# Altium PCB atuador_heater.PcbDoc
Units mm, origin at the board's own origin, x right, y up, seen from the top; angles counter-clockwise.
Board outline 50 x 50 mm, 2 copper layers (Top Layer, Bottom Layer); 10 components, 9 nets, 32 pads, 0 vias.
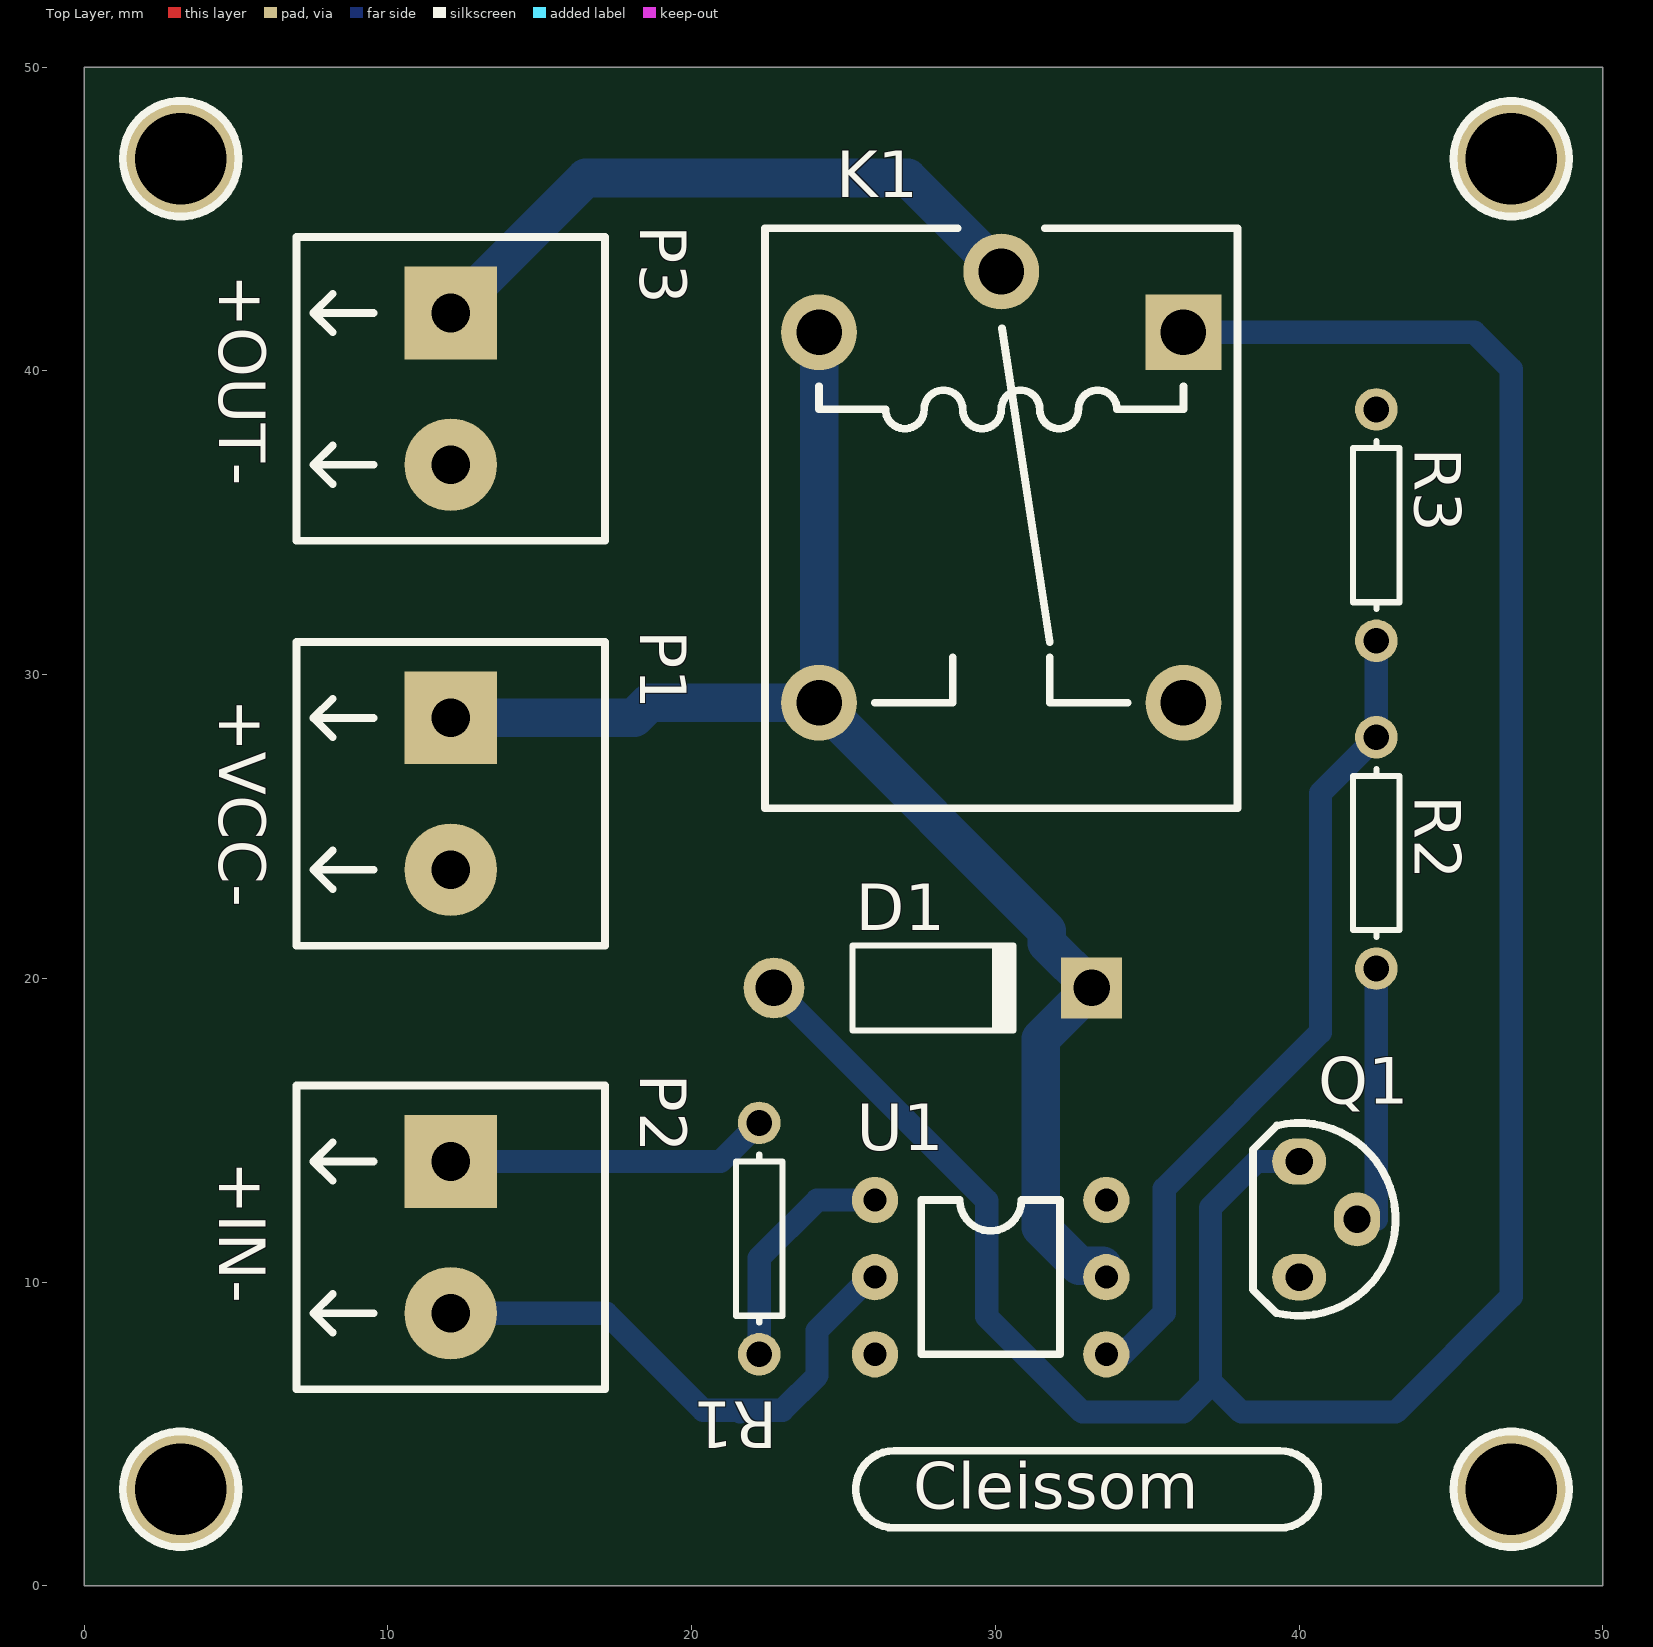
[diagram p0: Top Layer view]
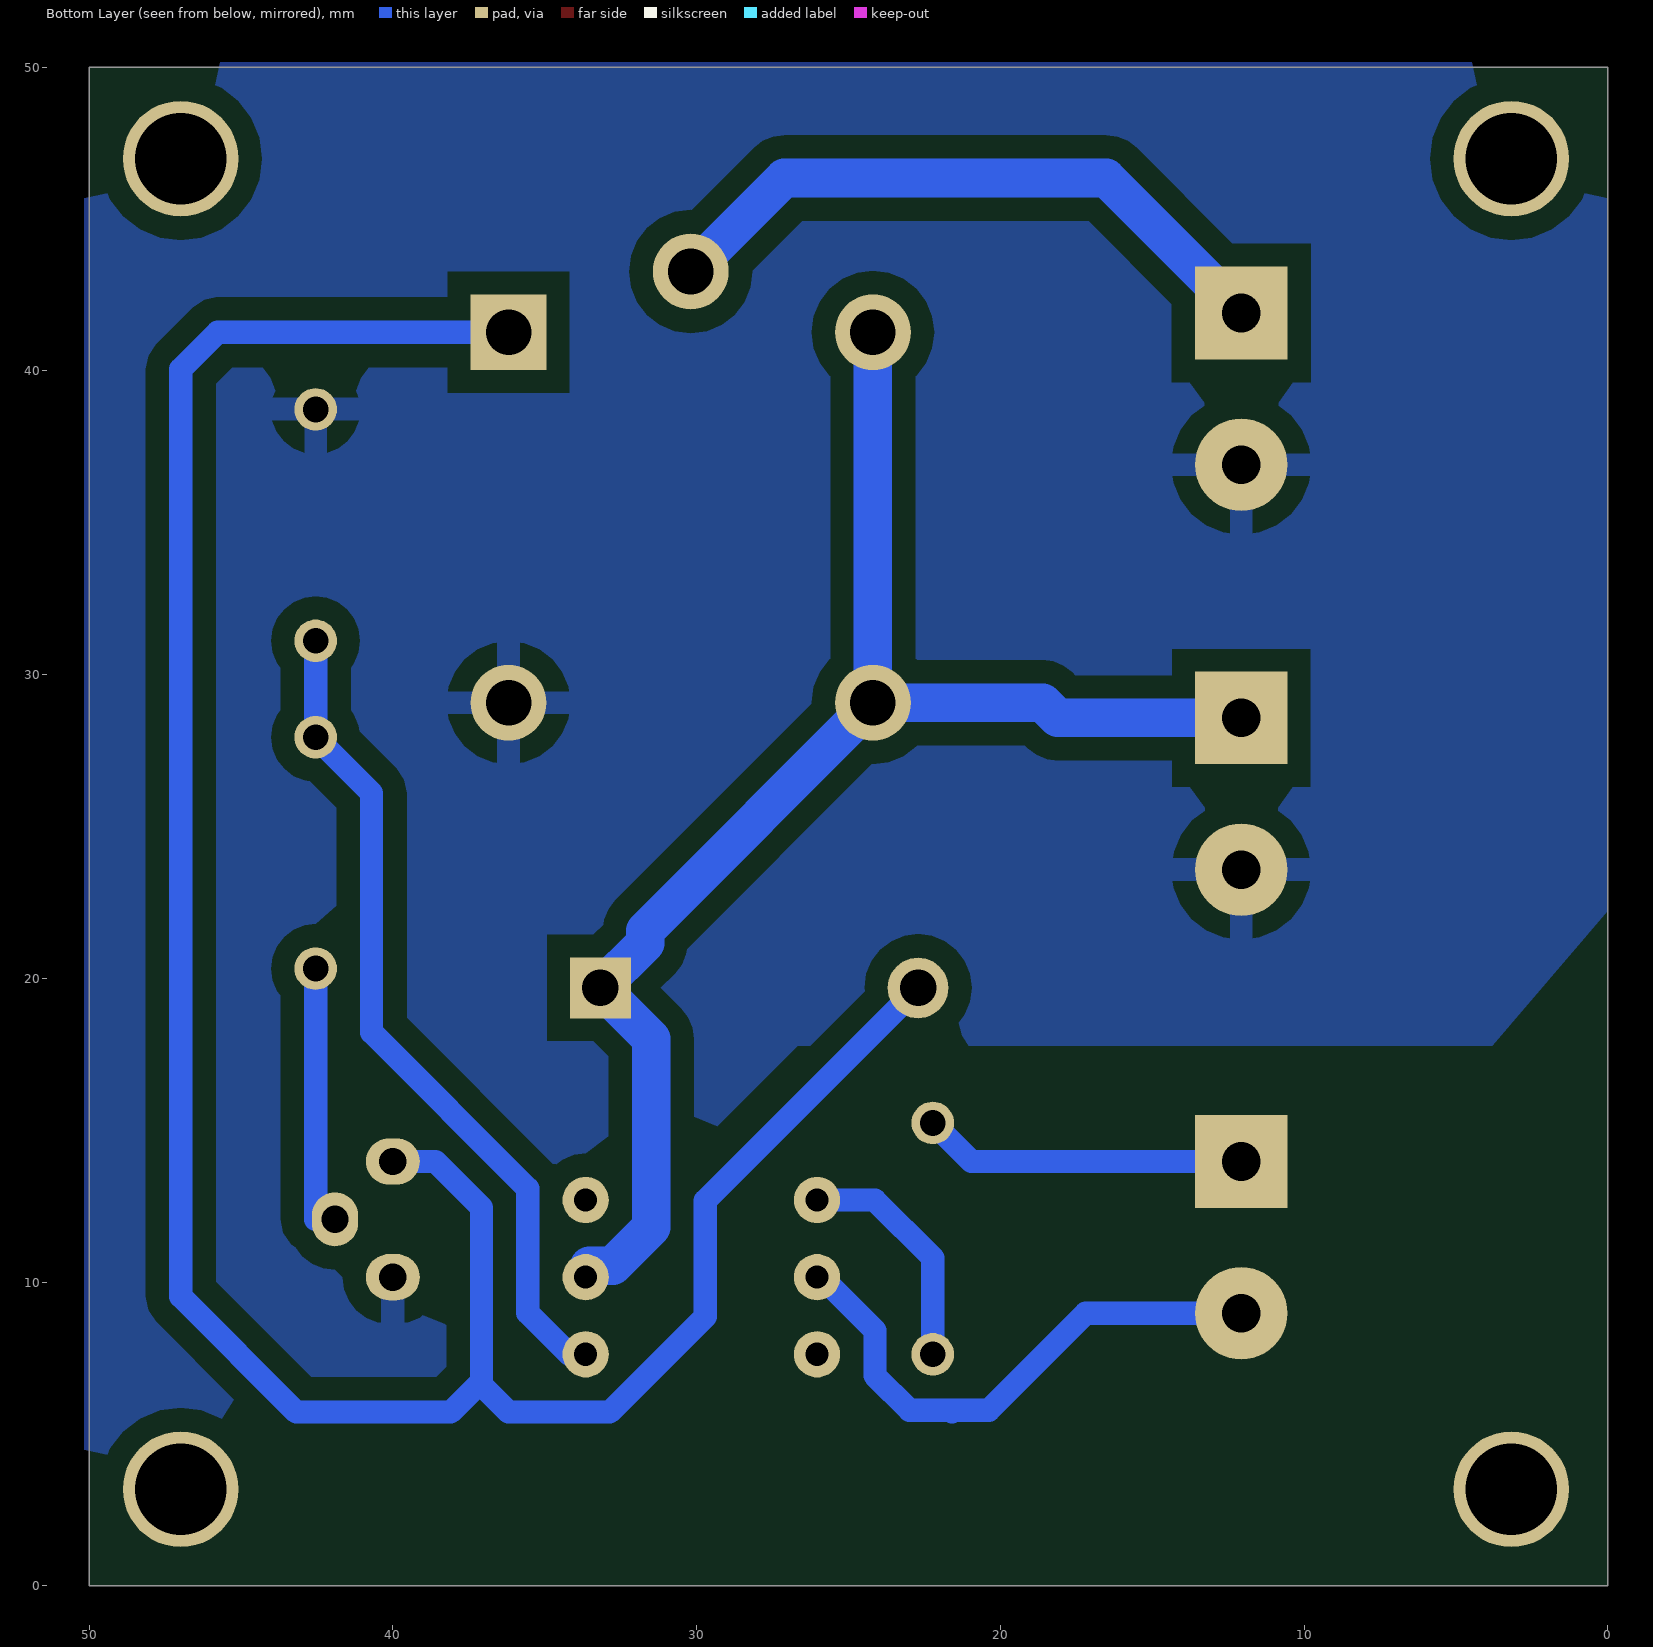
[diagram p1: Bottom Layer view, seen from below]
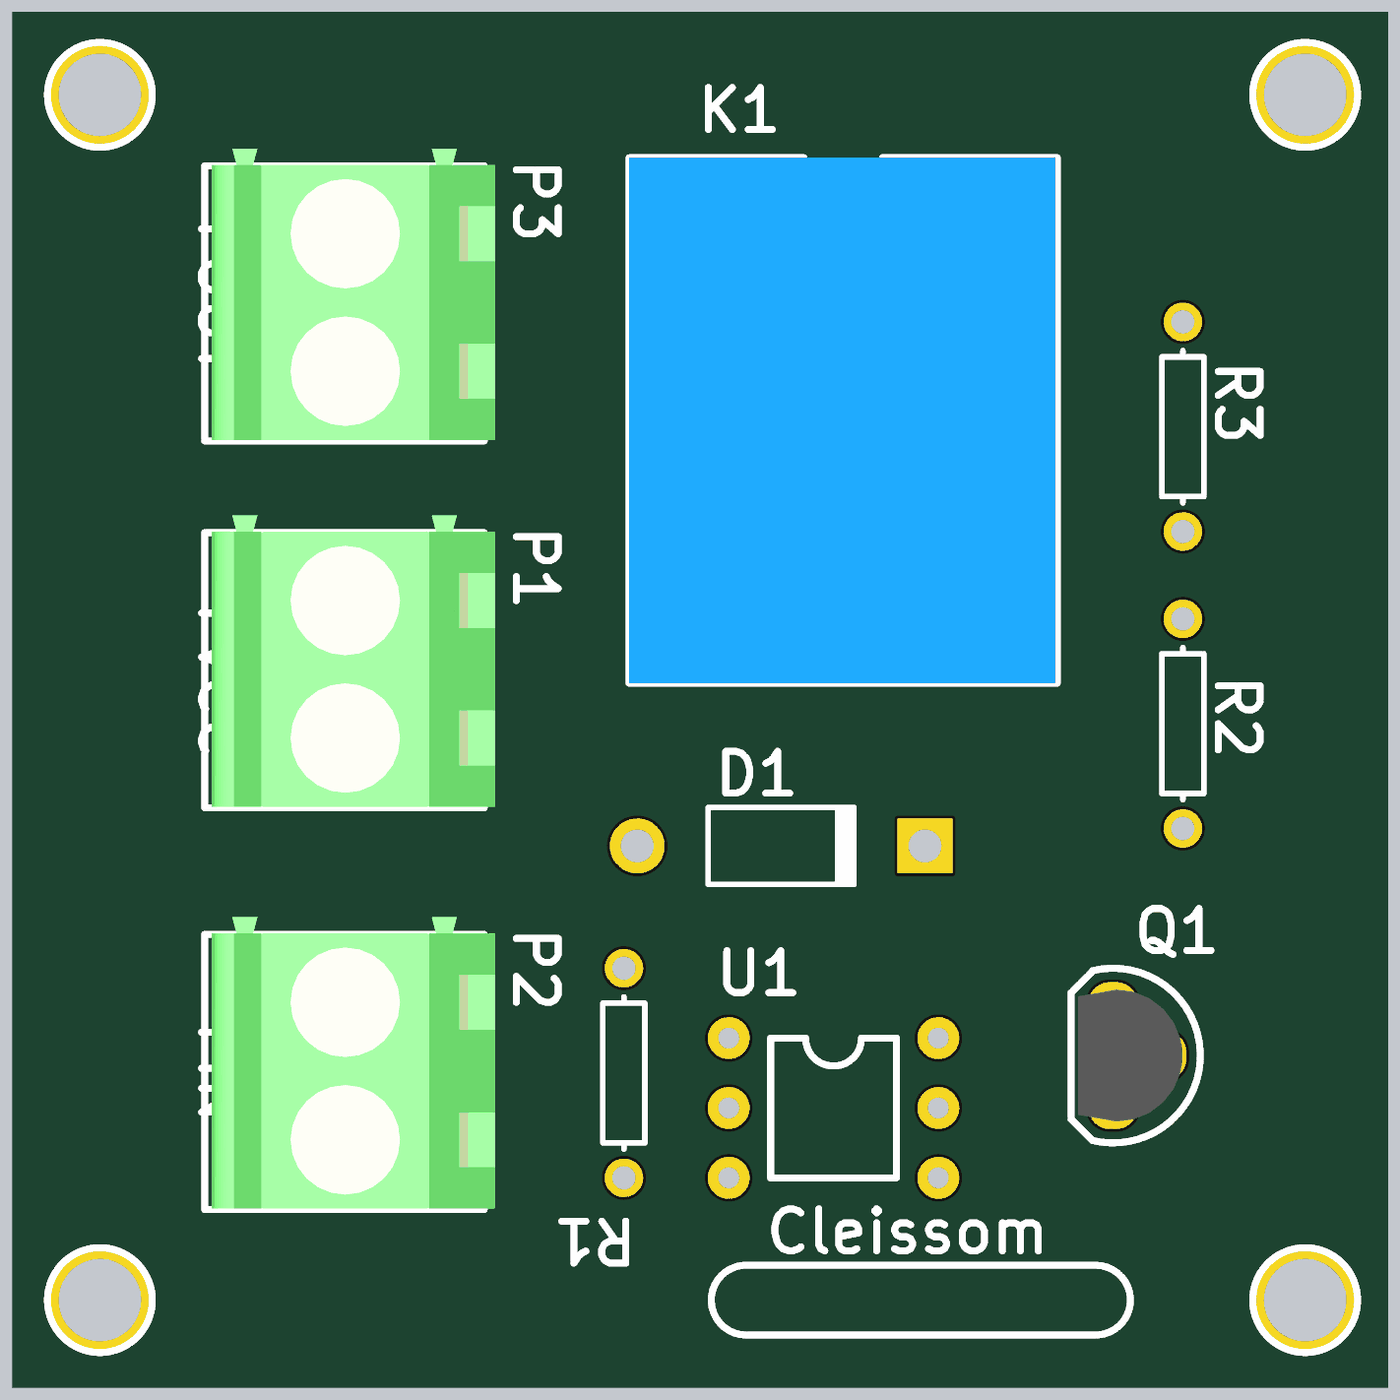
[diagram p2: 3D render of the assembled board from above, using the file's embedded part models]

## Layer stack, top to bottom
Top Solder: solder mask 0.0102, Solder Resist, Dk 3.5
Top Layer: signal copper 0.0356
Dielectric 1: dielectric 0.32, FR-4, Dk 4.8
Bottom Layer: signal copper 0.0356
Bottom Solder: solder mask 0.0102, Solder Resist, Dk 3.5

## Board outline
0,0 50,0 50,50 0,50

## Design rules (kind name [scope] priority, off if disabled: settings)
Clearance [All] p1: gap=0.762
PlaneConnect [All] p1: planeconnectstyle=Relief reliefexpansion=0.762 reliefentries=4 reliefconductorwidth=0.762 reliefairgap=0.762
PolygonConnect [All] p1: connectstyle=Relief reliefconductorwidth=0.762 reliefentries=4 polygonreliefangle="90 Angle" airgapwidth=0.762
RoutingLayers [All] p1: top layer_v5=FALSE bottom layer_v5=TRUE
RoutingVias [All] p1: holewidth=0.711 width=1.27 viastyle="Through Hole" minholewidth=0.711 minwidth=1.27 maxholewidth=0.711 maxwidth=1.27
SolderMaskExpansion [All] p1: expansion=0.102
Width Width_VCC [InNet('VCC')] p1: maxlimit=1.524 minlimit=1.27 preferedwidth=1.27
Width Width_NetK1 [InNet('NetK1_3')] p2: maxlimit=2.032 minlimit=1.27 preferedwidth=1.27
Width [All] p3: maxlimit=1.524 minlimit=0.762 preferedwidth=0.762
28 further rules are at their usual default settings.

## Components (designator, comment, footprint, x,y, rotation, side; value= is the part's Value field where it differs from the comment)
D1 "Diode 1N4007" DO-41 27.94,19.685 r0 top
K1 "AX1RC1" Relay-A 36.195,41.275 r0 top
P1 "Terminal" KRE_2 12.065,28.575 r270 top
P2 "Terminal" KRE_2 12.065,13.97 r270 top
P3 "Terminal" KRE_2 12.065,41.91 r270 top
Q1 "BC547" TO-92/CBE 40.005,13.97 r270 top
R1 "Res1" AXIAL-0.3 22.225,11.43 r270 top
R2 "Res1" AXIAL-0.3 42.545,24.13 r270 top
R3 "Res1" AXIAL-0.3 42.545,34.925 r270 top
U1 "4N25" 4N25 28.575,7.62 r0 top

## Footprints (in the part's own frame and the unit in brackets; to place one, negate y for a bottom-side part, rotate by r counter-clockwise, add the part's x,y. Pads: shape width x height; smd on the part's side, far side on the other; paste and mask are expansions set on the pad)
4N25 [mil]
  round 60 hole 30: 1(-100,200) 2(-100,100) 3(-100,0) 4(200,200) 5(200,100) 6(200,0)
  silkscreen extent -40,0 140,200
AXIAL-0.3 [mm] "Axial Device, Thru-Hole; 2 Leads; 0.3 in Pin Spacing"
  round 1.4 hole 0.85: 1(-3.81,0) 2(3.81,0)
  silkscreen extent -2.77,-0.76 2.77,0.76
DO-41 [mm] "Diode, Axial; Body 5.2 x 2.7 mm (LxDia. max), Lead Dia. 0.86 mm (max)"
  round 2 hole 1.2: 1(-5.23,0)
  rect 2x2 hole 1.2: 2(5.23,0)
  silkscreen extent -2.65,-1.4 2.75,1.4
KRE_2 [mil] "Terminal Block 2 pins"
  rect 120x120 hole 50: 1(0,0)
  round 120 hole 50: 2(196.85,0)
  silkscreen extent -98,-200 295,200, body extent -123,-190 294,216, height 559
Relay-A [mm] "Metaltex Relay Type A; 3D: Jean-François Garneau"
  rect 2.5x2.5 hole 1.5: 1(0,0)
  round 2.5 hole 1.5: 2(-12,0) 3(-6,2) 4(0,-12.2) 5(-12,-12.2)
  silkscreen extent -13.78,-15.67 1.78,3.43, body extent -13.78,-15.67 1.72,3.43, height 15.3
TO-92/CBE [mil] "Transistor Outline Package, Case Style 92 CBE; 3D Sergey Atanov"
  oval 70x60 hole 35.43: B(75,75)
  oval 60x70 hole 35.43: C(0,0) E(150,0)
  silkscreen extent -50,-60 200,125, body extent -37,-50 187,100, height 239

## Part data
D1: "1 Amp General Purpose Rectifier"
K1: "Miniature Relay, 15 A, 6 Vdc, 250 Vac"
P1 P2 P3: library part KRE_2, "Terminal Block 1x2"
Q1: "NPN Epitaxial Silicon Transistor"
R1 R2 R3: "Resistor"

## Free pads (board coordinates)
  round 3.81 hole 3: 0(3.175,3.175) 0(3.175,46.99) 0(46.99,3.175) 0(46.99,46.99)

## Nets (pads, with @x,y where several pads share a name; then routed paths per layer and width w, separated by ;. In a path a pad name is that pad's centre, name@x,y a point inside that pad or via, vN(x,y) a via of type N, cw(c..) or ccw(c..) an arc to the next point about the centre after c; other vN are vias at no path point)
GND: K1.4 P1.2 P3.2 Q1.E R3.1
NetD1_1: D1.1 K1.1 Q1.C | length 85.9
  Bottom Layer w0.762: D1.1 29.718,12.677 29.718,8.863 32.866,5.715 36.195,5.715 37.084,6.604 37.084,6.731 ; K1.1 45.771,41.275 46.99,40.056 46.99,9.525 43.18,5.715 38.1,5.715 37.084,6.731 ; Q1.C 38.608,13.97 37.084,12.446 37.084,6.731
NetK1_3: K1.3 P3.1 | length 21.2
  Bottom Layer w1.27: P3.1 16.51,46.355 27.115,46.355 K1.3
NetP2_1: P2.1 R1.1 | length 10.7
  Bottom Layer w0.762: P2.1 20.955,13.97 R1.1
NetP2_2: P2.2 U1.2 | length 18
  Bottom Layer w0.762: P2.2 17.189,8.97 20.382,5.777 21.528,5.777 21.59,5.715 21.652,5.777 22.988,5.777 24.13,6.919 24.13,8.409 25.881,10.16 U1.2
NetQ1_B: Q1.B R2.2 | length 8.9
  Bottom Layer w0.762: Q1.B 42.545,12.065 R2.2
NetR1_2: R1.2 U1.1 | length 7.8
  Bottom Layer w0.762: R1.2 22.225,10.795 24.13,12.7 U1.1
NetR2_1: R2.1 R3.2 U1.6 | length 27.5
  Bottom Layer w0.762: U1.6 34.19,7.62 35.56,8.99 35.56,13.077 40.702,18.219 40.702,26.097 R2.1 R3.2
VCC: D1.2 K1.2 K1.5 P1.1 U1.5 | length 49.3
  Bottom Layer w1.27: P1.1 18.11,28.575 18.61,29.075 K1.5 ; K1.2 K1.5 ; U1.5 33.528,10.16 33.528,10.541 32.761,10.541 31.496,11.806 31.496,18.011 D1.2 31.699,21.156 31.699,21.571 K1.5
pads on no net: U1.3 U1.4

## Polygon pours and split planes (outlines as drawn)
GND on Bottom Layer "GND_L02_P-001" (solid, remove dead copper, pour order 2): 0,50.165 50.165,50.165 50.165,0 49.53,0.635 36.195,0.635 35.56,0.635 29.845,6.35 29.845,14.605 26.67,17.78 16.51,17.78 3.81,17.78 0,22.225

## Silkscreen, mask and mechanical layers (free items; w line width, h text height)
Top Overlay:
  circle w0.254: c3.175,3.175 r1.905
  circle w0.254: c46.99,3.175 r1.905
  circle w0.254: c46.99,46.99 r1.905
  circle w0.254: c3.175,46.99 r1.905
  lines w0.254: 26.67,1.905 cw(c26.67,3.175) 26.67,4.445 39.37,4.445 cw(c39.37,3.175) 39.37,1.905 26.67,1.905
  text "+OUT-" at 4.445,43.18 h1.52 r270
  text "+VCC-" at 4.445,29.21 h1.52 r270
  text "+IN-" at 4.445,13.97 h1.52 r270
  text "Cleissom" at 27.305,2.54 h1.52